# Altium PCB PCB1.PcbDoc
Units mil, origin at the board's own origin, x right, y up, seen from the top; angles counter-clockwise.
Board outline 3250 x 3000 mil, 2 copper layers (Top Layer, Bottom Layer); 12 components, 7 nets, 124 pads, 0 vias.
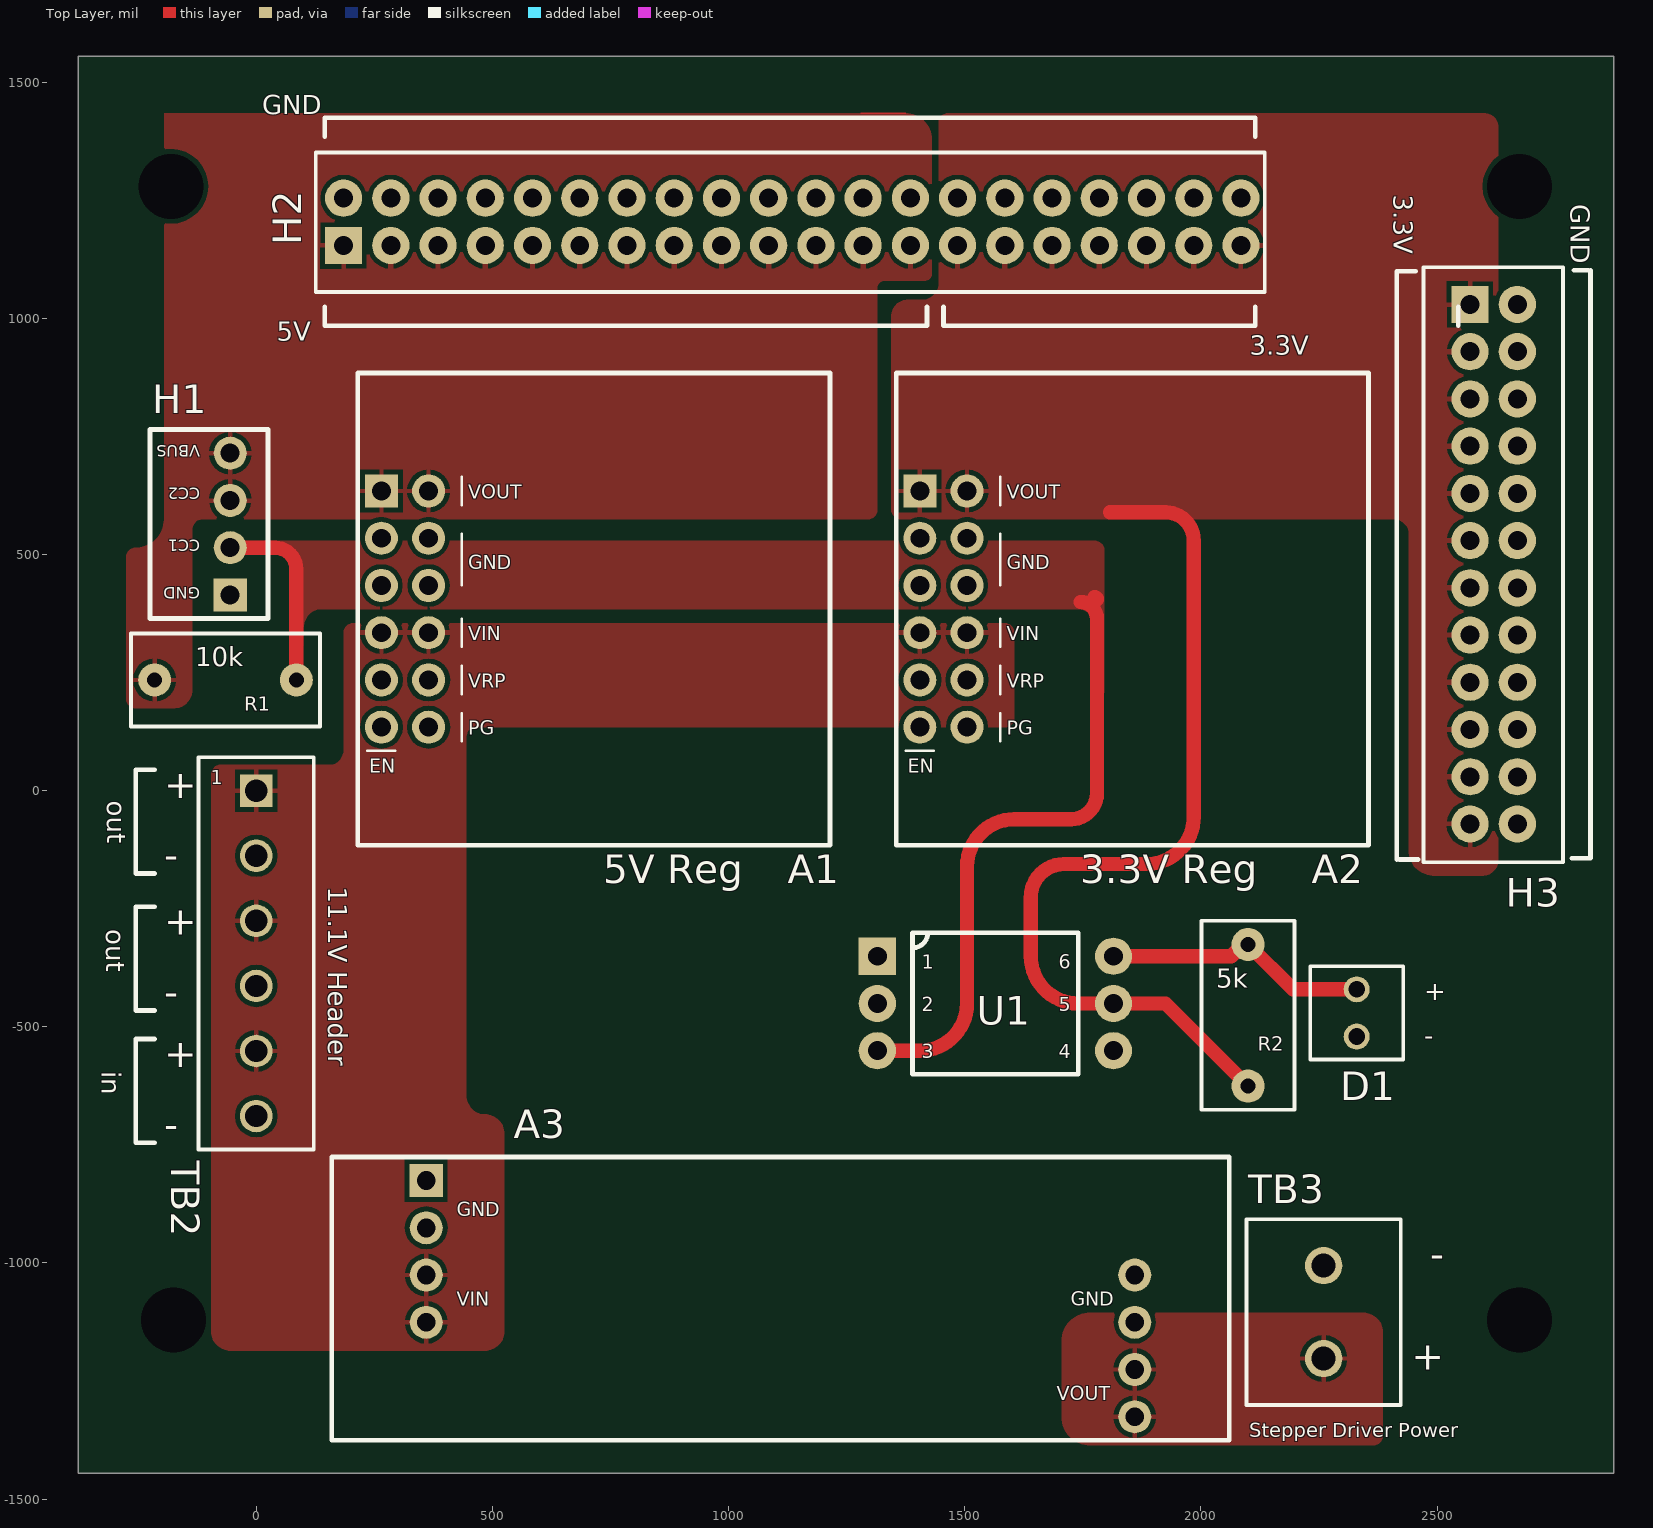
[diagram p0: Top Layer view]
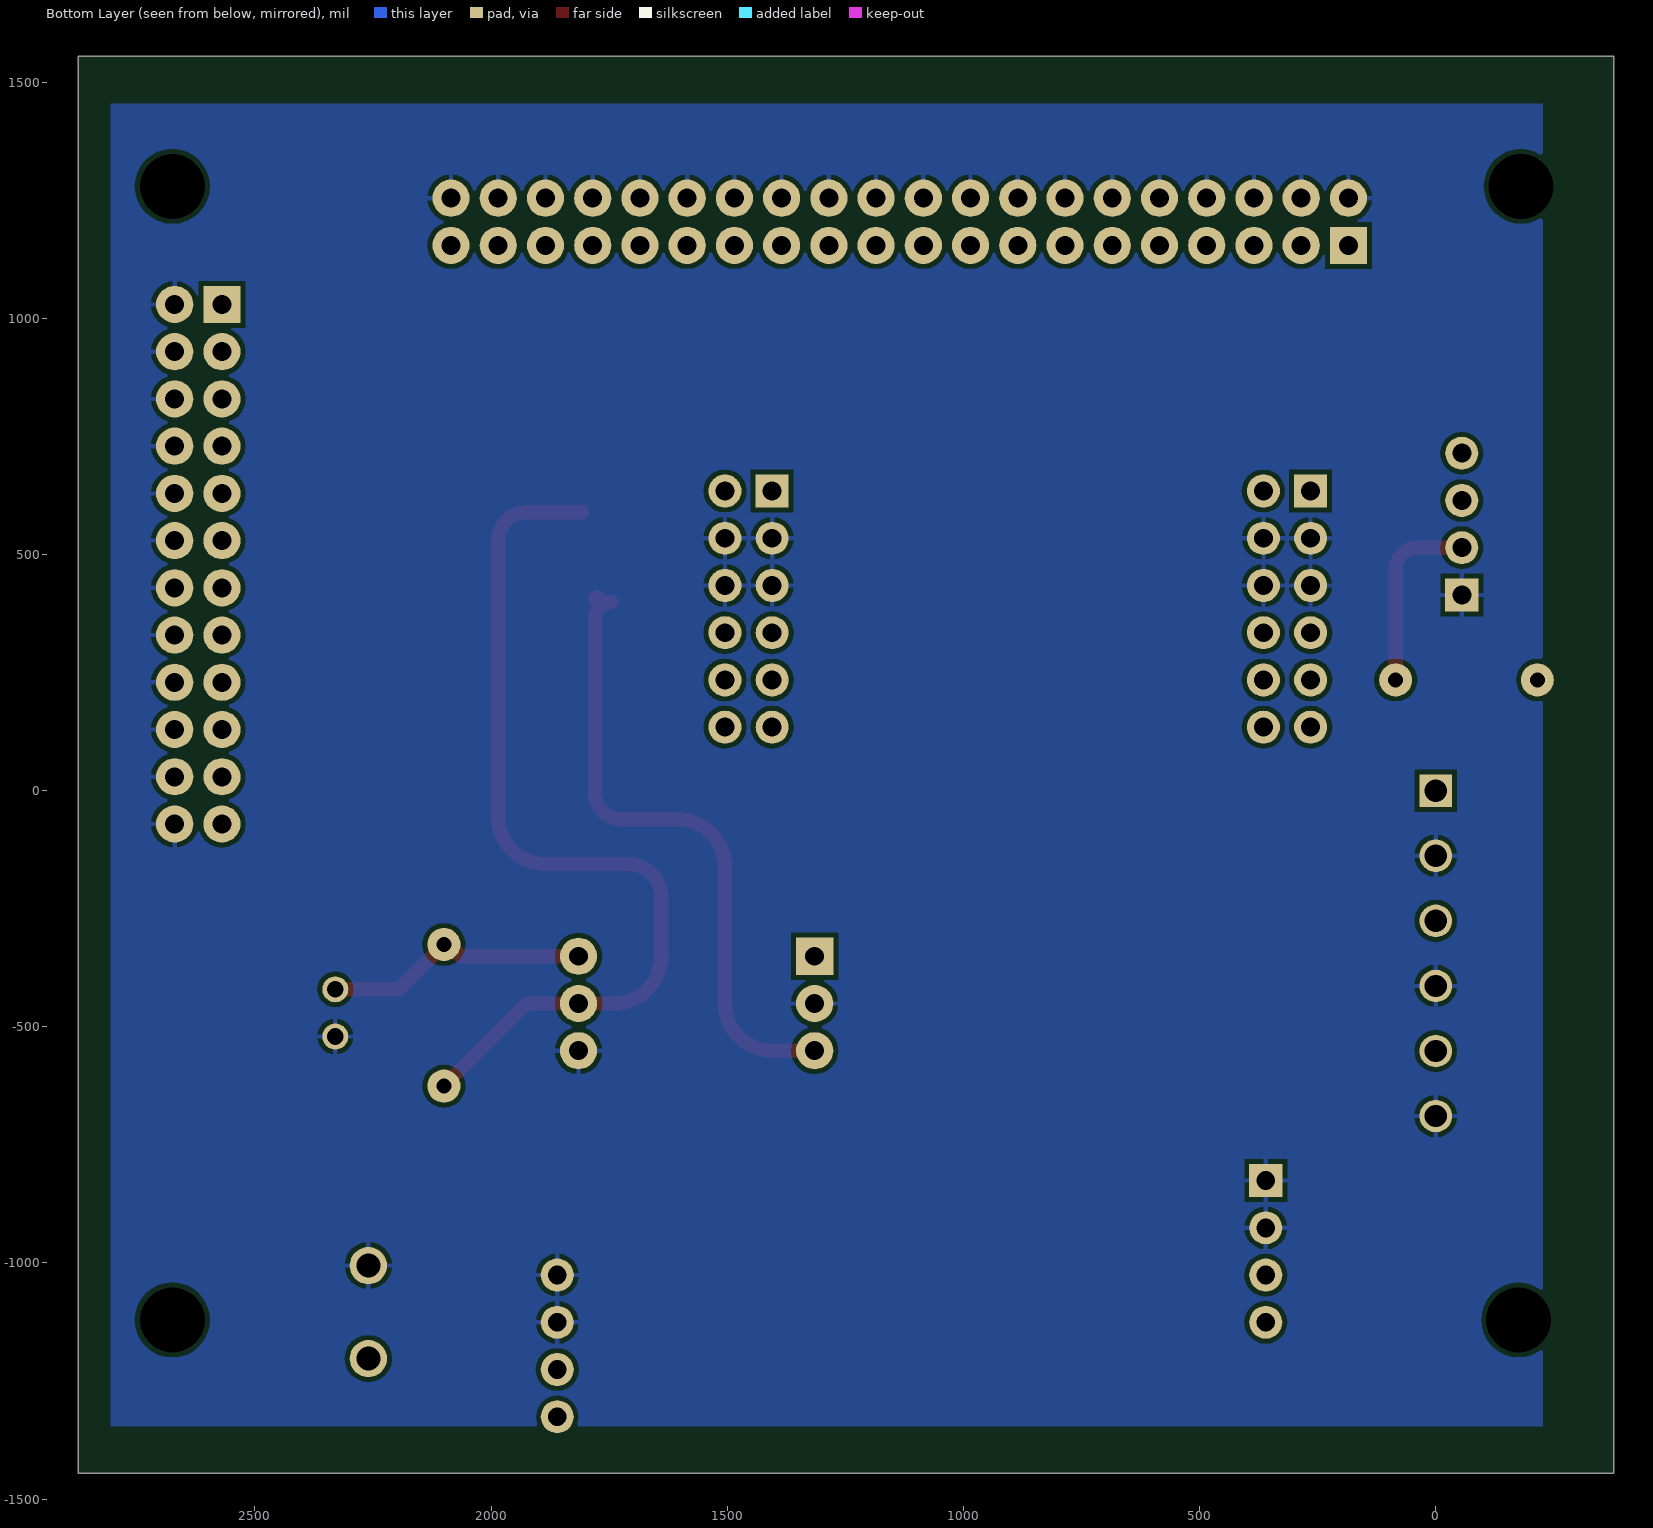
[diagram p1: Bottom Layer view, seen from below]
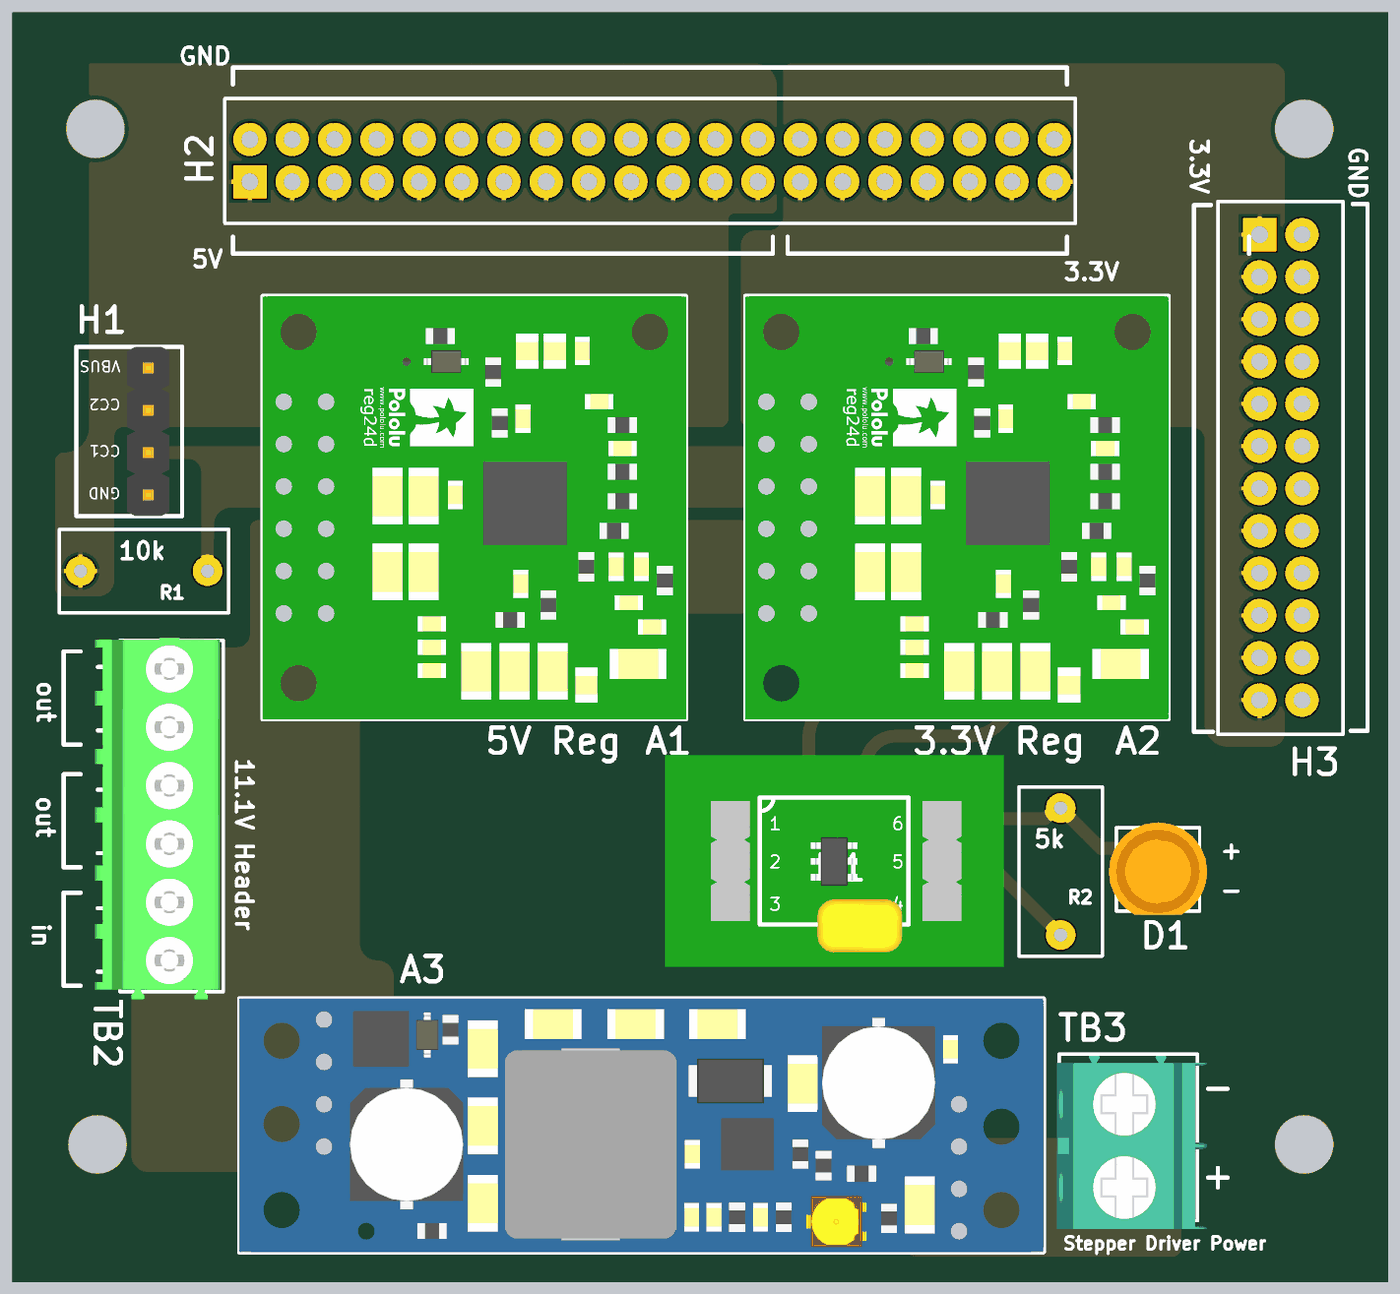
[diagram p2: 3D render of the assembled board from above, using the file's embedded part models]

## Layer stack, top to bottom
Top Solder: solder mask 0.4, Solder Resist, Dk 3.5
Top Layer: signal copper 1.4
Dielectric 1: dielectric 12.6, FR-4, Dk 4.8
Bottom Layer: signal copper 1.4
Bottom Solder: solder mask 0.4, Solder Resist, Dk 3.5

## Board outline
-376.3,1554.41 2873.7,1554.41 2873.7,-1445.59 -376.3,-1445.59

## Design rules (kind name [scope] priority, off if disabled: settings)
Clearance [All] p1: gap=10 ignorepadtopadclearanceinfootprint=FALSE except(0: Arc-Hole Track-Hole SMDPad-Hole THPad-Hole Via-Hole Fill-Hole Poly-Hole Region-Hole Text-Hole)
PolygonConnect [All] p1: connectstyle=Relief reliefconductorwidth=10 reliefentries=4 polygonreliefangle="90 Angle" airgapwidth=10
RoutingVias [All] p1: holewidth=28 width=50 viastyle="Through Hole" minholewidth=28 minwidth=50 maxholewidth=28 maxwidth=50
SolderMaskExpansion [All] p1: expansion=4 istentingtop=FALSE
Width [All] p1: maxlimit=500 minlimit=10 preferedwidth=10
30 further rules are at their usual default settings.

## Components (designator, comment, footprint, x,y, rotation, side; value= is the part's Value field where it differs from the comment)
A1 "Step Down Voltage Regulator" "New Volt Reg TEMPLATE" 265,634.41 r0 top
A2 "Step Down Voltage Regulator" "New Volt Reg TEMPLATE" 1405,634.41 r0 top
A3 "Step Up Regulator" "24V STEP UP REGULATOR" 360,-825.59 r0 top
D1 "LED" LED 2330,-520.59 r90 top
H1 "USB Type-C Receptacle" "USB Type-C Receptacle" -55,414.41 r180 top
H2 "2x20 Position Header" "2x20 Header" 185,1154.41 r90 top
H3 "2x12 Header" "2x12 HEADER" 2570,1029.41 r0 top
R1 "10k" Resistor 85,234.41 r180 top
R2 "5k" Resistor 2100,-625.59 r90 top
TB2 "6 Position Terminal Block" "NEW 6 Terminal" 0,0 r0 top
TB3 "2 Position Terminal Block" "Terminal Block" 2260,-1202.44 r90 top
U1 "TPS3702 Breakout" "TPS3702 Breakout" 1315,-350.59 r0 top

## Footprints (in the part's own frame and the unit in brackets; to place one, negate y for a bottom-side part, rotate by r counter-clockwise, add the part's x,y. Pads: shape width x height; smd on the part's side, far side on the other; paste and mask are expansions set on the pad)
"2x12 HEADER" [mm]
  rect 2x2 hole 1.02: 1(0,0)
  round 2 hole 1.02: 2(0,-2.54) 3(0,-5.08) 4(0,-7.62) 5(0,-10.16) 6(0,-12.7) 7(0,-15.24) 8(0,-17.78) 9(0,-20.32) 10(0,-22.86) 11(0,-25.4) 12(0,-27.94) 13(2.54,-27.94) 14(2.54,-25.4) 15(2.54,-22.86) 16(2.54,-20.32) 17(2.54,-17.78) 18(2.54,-15.24) 19(2.54,-12.7) 20(2.54,-10.16) 21(2.54,-7.62) 22(2.54,-5.08) 23(2.54,-2.54) 24(2.54,0)
  silkscreen extent -2.5,-30 5,2
"2x20 Header" [mm]
  rect 2x2 hole 1.02: 1(0,0)
  round 2 hole 1.02: 2(0,-2.54) 3(0,-5.08) 4(0,-7.62) 5(0,-10.16) 6(0,-12.7) 7(0,-15.24) 8(0,-17.78) 9(0,-20.32) 10(0,-22.86) 11(0,-25.4) 12(0,-27.94) 13(0,-30.48) 14(0,-33.02) 15(0,-35.56) 16(0,-38.1) 17(0,-40.64) 18(0,-43.18) 19(0,-45.72) 20(0,-48.26) 21(2.54,-48.26) 22(2.54,-45.72) 23(2.54,-43.18) 24(2.54,-40.64) 25(2.54,-38.1) 26(2.54,-35.56) 27(2.54,-33.02) 28(2.54,-30.48) 29(2.54,-27.94) 30(2.54,-25.4) 31(2.54,-22.86) 32(2.54,-20.32) 33(2.54,-17.78) 34(2.54,-15.24) 35(2.54,-12.7) 36(2.54,-10.16) 37(2.54,-7.62) 38(2.54,-5.08) 39(2.54,-2.54) 40(2.54,0)
  silkscreen extent -2.5,-49.53 5,1.5
"24V STEP UP REGULATOR" [mil]
  round 70 hole 40: 1(0,-300) 1(0,-200) 2(0,-100) 3(1500,-300) 3(1500,-200) 4(1500,-500) 4(1500,-400)
  rect 70x70 hole 40: 2(0,0)
  silkscreen extent -200,-550 1700,50, body extent -200,-550 1700,50, height 408
LED [mil]
  round 55 hole 35.43: 1(0,0) 2(100,0)
  silkscreen extent -49,-98 149,98, body extent -57,-116 161,116, height 359
"NEW 6 Terminal" [mm]
  rect 1.75x1.75 hole 1.2: 1(0,0)
  round 1.75 hole 1.2: 2(0,-3.5) 3(0,-7) 4(0,-10.5) 5(0,-14) 6(0,-17.5)
  silkscreen extent -3.1,-19.3 3.1,1.8, body extent -4.63,-19.74 2.92,1.96, height 9.15
"New Volt Reg TEMPLATE" [mil]
  rect 70x70 hole 40: 1(0,0)
  round 70 hole 40: 1(100,0) 2(0,-200) 2(0,-100) 2(100,-200) 2(100,-100) 3(0,-300) 3(100,-300) 4(0,-400) 4(100,-400) 5(0,-500) 6(100,-500)
  silkscreen extent -50,-750 950,250, body extent -50,-750 950,250, height 133
Resistor [mil]
  round 70 hole 31.5: 1(0,0) 2(300,0)
  silkscreen extent -50,-98 350,98
"Terminal Block" [mm]
  round 2 hole 1.3: 1(0,0) 2(5,0)
  silkscreen extent -2.5,-4.15 7.5,4.15, body extent -3.01,-4.71 7.39,4.29, height 11.41
"TPS3702 Breakout" [mm]
  rect 2x2 hole 1.02: 1(0,0)
  round 2 hole 1.02: 2(0,-2.54) 3(0,-5.08) 4(12.7,-5.08) 5(12.7,-2.54) 6(12.7,0)
  silkscreen extent 1.89,-6.35 10.81,1.27, body extent -3.81,-8.89 16.51,3.81, height 5.35
"USB Type-C Receptacle" [mil]
  rect 70x70 hole 40.16: 1(0,0)
  round 70 hole 40.16: 2(0,-100) 3(0,-200) 4(0,-300)
  silkscreen extent -80,-350 170,50, body extent -50,-350 50,50, height 317

## Part data
R1 R2: library part Resistor

## Free pads (board coordinates)
  round 3 hole 137.8: 2(-180,1279.41) 2(-175,-1120.59) 2(2675,-1120.59) 2(2675,1279.41)

## Nets (pads, with @x,y where several pads share a name; then routed paths per layer and width w, separated by ;. In a path a pad name is that pad's centre, name@x,y a point inside that pad or via, vN(x,y) a via of type N, cw(c..) or ccw(c..) an arc to the next point about the centre after c; other vN are vias at no path point)
3.3V: A2.1 H2.14 H2.15 H2.16 H2.17 H2.18 H2.19 H2.20 H3.1 H3.2 H3.3 H3.4 H3.5 H3.6 H3.7 H3.8 H3.9 H3.10 H3.11 H3.12 R2.1 U1.5 | length 1953.4
  Top Layer w30: 1807.5,589.41 1925,589.41 cw(c1925,529.41) 1985,529.41 1985,-55.59 cw(c1885,-55.59) 1885,-155.59 1710,-155.59 ccw(c1710,-225.59) 1640,-225.59 1640,-350.59 ccw(c1740,-350.59) 1740,-450.59 U1.5 1925,-450.59 R2.1
5V: A1.1 H1.3 H1.4 H2.1 H2.2 H2.3 H2.4 H2.5 H2.6 H2.7 H2.8 H2.9 H2.10 H2.11 H2.12 H2.13 R1.2
24V: A3.4 TB3.1
BatteryIn: A1.3 A2.3 A3.1 TB2.1 TB2.3 TB2.5
GND: A1.2 A2.2 A3.2 A3.3 D1.1 H1.1 H2.21 H2.22 H2.23 H2.24 H2.25 H2.26 H2.27 H2.28 H2.29 H2.30 H2.31 H2.32 H2.33 H2.34 H2.35 H2.36 H2.37 H2.38 H2.39 H2.40 H3.13 H3.14 H3.15 H3.16 H3.17 H3.18 H3.19 H3.20 H3.21 H3.22 H3.23 H3.24 TB2.2 TB2.4 TB2.6 TB3.2 U1.2 U1.4
NetD1_2: D1.2 R2.2 U1.6 | length 564.7
  Top Layer w30: U1.6 2064.18,-350.59 2089.18,-325.59 R2.2 2195,-420.59 D1.2
NetH1_2: H1.2 R1.1 U1.3 | length 1734
  Top Layer w30: H1.2 39.66,514.41 cw(c39.66,469.31) 84.76,469.31 84.76,234.41 R1.1 ; U1.3 1405,-550.59 ccw(c1405,-450.59) 1505,-450.59 1505,-160.59 cw(c1605,-160.59) 1605,-60.59 1725,-60.59 ccw(c1725,-5.59) 1780,-5.59 1780,364.41 ccw(c1745,364.41) 1745,399.41 ; 1775,409.41 cw(c1775,404.41) 1780,404.41
pads on no net: A1.4 A1.5 A1.6 A2.4 A2.5 A2.6 U1.1

## Polygon pours and split planes (outlines as drawn)
3.3V on Top Layer "3.3V_L01_P031" (solid, pour order 31): 1713,624.41 ccw(c1748,624.41) 1748,589.41 1866.99,589.41 cw(c1866.99,581.91) 1866.99,574.41 1612,574.41 cw(c1612,582.41) 1604,582.41 1604,761.41 cw(c1623,761.41) 1623,780.41 1703,780.41 cw(c1703,770.41) 1713,770.41
3.3V on Top Layer "3.3V_L01_P014" (solid, pour order 14): 2264.92,1004.41 2264.92,615.03 cw(c2224.92,615.03) 2224.92,575.03 1364.92,575.03 cw(c1364.92,595.03) 1344.92,595.03 1344.92,1004.41
3.3V on Top Layer "3.3V_L01_P044" (solid, pour order 44): 1345,1004.41 cw(c1379.92,1004.41) 1379.92,1039.41 1410,1039.41 ccw(c1410,1074.41) 1445,1074.41 1445,1414.41 cw(c1465,1414.41) 1465,1434.41 2149.58,1434.41 cw(c2149.58,1398.99) 2185,1398.99 2185,964.41 cw(c2180,964.41) 2180,959.41 1345,959.41
5V on Top Layer "5V_L01_P043" (solid, pour order 43): 1260,1434.41 1375,1434.41 cw(c1375,1379.41) 1430,1379.41 1430,1094.41 cw(c1415,1094.41) 1415,1079.41 1330,1079.41 ccw(c1330,1064.41) 1315,1064.41 1315,994.41 1260,994.41
no net on Top Layer "NONET_L01_P041" (solid, pour order 41): 1280,1434.41 1365,1434.41 1375,1434.41
NetH1_2 on Top Layer "NETH1_2_L01_P033" (solid, pour order 33): 140,384.41 ccw(c140,344.41) 100,344.41 100,309.41 cw(c95,309.41) 95,304.41 cw(c95,314.41) 85,314.41 85,429.41 185,429.41 cw(c185,419.41) 195,419.41 195,404.41 cw(c175,404.41) 175,384.41
NetH1_2 on Top Layer "NETH1_2_L01_P016" (solid, pour order 16): 790,529.41 cw(c790,514.41) 805,514.41 805,404.41 cw(c785,404.41) 785,384.41 95,384.41 cw(c95,394.41) 85,394.41 85,464.41 ccw(c35,464.41) 35,514.41 15,514.41 cw(c15,519.41) 10,519.41 cw(c20,519.41) 20,529.41
NetH1_2 on Top Layer "NETH1_2_L01_P032" (solid, pour order 32): 1740,384.41 cw(c1740,349.41) 1775,349.41 1775,209.41 ccw(c1785,209.41) 1785,199.41 ccw(c1785,209.41) 1795,209.41 1795,424.41 ccw(c1770,424.41) 1770,449.41 1685,449.41 ccw(c1685,444.41) 1680,444.41 1680,399.41 ccw(c1695,399.41) 1695,384.41
NetH1_2 on Top Layer "NETH1_2_L01_P024" (solid, pour order 24): 1775,529.41 cw(c1775,509.41) 1795,509.41 1795,404.41 cw(c1775,404.41) 1775,384.41 770,384.41 cw(c770,404.41) 750,404.41 750,514.41 cw(c765,514.41) 765,529.41
3.3V on Top Layer "3.3V_L01_P039" (solid, pour order 39): 2410,574.41 cw(c2410,544.41) 2440,544.41 2440,-125.59 ccw(c2495,-125.59) 2495,-180.59 2595,-180.59 ccw(c2595,-145.59) 2630,-145.59 2630,1404.41 ccw(c2600,1404.41) 2600,1434.41 2155,1434.41 ccw(c2155,1379.41) 2100,1379.41 2100,629.41 ccw(c2155,629.41) 2155,574.41
5V on Top Layer "5V_L01_P036" (solid, pour order 36): 1315,1434.41 1315,594.41 cw(c1295,594.41) 1295,574.41 645,574.41 cw(c645,634.41) 585,634.41 585,1404.41 cw(c615,1404.41) 615,1434.41
5V on Top Layer "5V_L01_P008" (solid, pour order 8): 705,1434.41 cw(c705,1414.41) 725,1414.41 725,614.41 cw(c685,614.41) 685,574.41 -175,574.41 cw(c-175,594.41) -195,594.41 -195,1434.41
BatteryIn on Top Layer "BATTERYIN_L01_P037" (solid, pour order 37): 185,84.41 cw(c155,84.41) 155,54.41 -75,54.41 ccw(c-75,34.41) -95,34.41 -95,-595.59 ccw(c-65,-595.59) -65,-625.59 225,-625.59 ccw(c225,-595.59) 255,-595.59 255,154.41 205,154.41 ccw(c205,134.41) 185,134.41
24V on Top Layer "24V_L01_P035" (solid, pour order 35): 1705,-1325.59 ccw(c1765,-1325.59) 1765,-1385.59 2365,-1385.59 ccw(c2365,-1365.59) 2385,-1365.59 2385,-1145.59 ccw(c2345,-1145.59) 2345,-1105.59 1765,-1105.59 ccw(c1765,-1165.59) 1705,-1165.59
BatteryIn on Top Layer "BATTERYIN_L01_P034" (solid, pour order 34): 525,-1145.59 cw(c485,-1145.59) 485,-1185.59 -55,-1185.59 cw(c-55,-1145.59) -95,-1145.59 -95,-545.59 cw(c-15,-545.59) -15,-465.59 85,-465.59 ccw(c85,-365.59) 185,-365.59 185,334.41 cw(c205,334.41) 205,354.41 1585,354.41 cw(c1585,334.41) 1605,334.41 1605,154.41 cw(c1585,154.41) 1585,134.41 465,134.41 ccw(c465,114.41) 445,114.41 445,-645.59 ccw(c485,-645.59) 485,-685.59 cw(c485,-725.59) 525,-725.59
5V on Top Layer "5V_L01_P013" (solid, pour order 13): -195,654.41 -195,574.41 cw(c-255,574.41) -255,514.41 ccw(c-255,494.41) -275,494.41 -275,194.41 ccw(c-255,194.41) -255,174.41 -175,174.41 ccw(c-175,214.41) -135,214.41 -135,554.41 cw(c-115,554.41) -115,574.41 -115,654.41
GND on Bottom Layer "GND_L02_P000" (solid, pour order 0): -226.3,1454.41 -226.3,-1345.59 2805,-1345.59 2805,1454.41

## Silkscreen, mask and mechanical layers (free items; w line width, h text height)
Top Overlay:
  lines w10: -215,-745.59 -255,-745.59 -255,-525.59 -215,-525.59 ; -215,-465.59 -255,-465.59 -255,-245.59 -215,-245.59 ; -215,-175.59 -255,-175.59 -255,44.41 -215,44.41 ; 145,1024.41 145,984.41 1420,984.41 1420,1024.41 ; 145,1384.41 145,1424.41 2115,1424.41 2115,1384.41 ; 1455,1024.41 1455,984.41 2115,984.41 2115,1024.41 ; 2415,-145.59 2415,1099.41 2445,1099.41 2455,1099.41 ; 2420,-145.59 2450,-145.59 2460,-145.59 ; 2545,984.41 2545,1024.41 ; 2785,-143.09 2795,-143.09 2825,-143.09 2825,1101.91 ; 2790,1101.91 2820,1101.91
  text "GND" at 13,1432.41 h40
  text "3.3V" at 2408,1261.41 h40 r270
  text "GND" at 2783,1241.41 h40 r270
  text "5V" at 43,952.41 h40
  text "3.3V" at 2103,922.41 h40
  text "10k" at -129.17,263.55 h40
  text "+" at -195,-15.59 h60
  text "out" at -315.86,-21.43 h40 r270
  text "-" at -195,-165.58 h60
  text "5V Reg" at 735,-195.6 h60
  text "3.3V Reg" at 1745,-195.6 h60
  text "11.1V Header" at 153,-203.59 h40 r270
  text "out" at -317,-293.59 h40 r270
  text "+" at -195,-305.59 h60
  text "5k" at 2033,-417.59 h40
  text "+" at 2473,-444.26 h40
  text "-" at -195,-455.58 h60
  text "-" at 2473,-537.58 h40
  text "+" at -195,-585.59 h60
  text "in" at -327,-593.59 h40 r270
  text "-" at -195,-735.58 h60
  text "-" at 2515,-965.6 h60 r180
  text "+" at 2515,-1175.59 h60 r180
  text "Stepper Driver Power" at 2102,-1368.59 h30
Board Outline:
  lines w3.94: -375,-1445.59 -375,1554.41 2875,1554.41 2875,-1445.59 -375,-1445.59
Mounting Hole Spacing (Mech5):
  lines w25: -175,-1935.59 -175,-1465.59 ; 50,-1475.59 -175,-1700.59 ; 60,-1935.59 -175,-1700.59 ; 2440,-1465.59 2675,-1700.59 ; 2450,-1925.59 2675,-1700.59 ; 2675,-1935.59 2675,-1465.59 ; 2900,-1120.59 3370,-1120.59 ; 2900,1044.41 3135,1279.41 ; 2900,1279.41 3370,1279.41 ; 2910,-895.59 3135,-1120.59 ; 3360,1054.41 3135,1279.41 ; 3370,-885.59 3135,-1120.59 ; -175,-1700.59 2675,-1700.59 ; 3135,-1120.59 3135,1279.41
  text "2.4 inches / 60.96 mm" at 3510,-475.59 h100 r90
  text "2.85 inches / 72.39 mm" at 720,-2055.59 h100

## Text inside footprints (layer, text, board x,y; h text height)
A1: Top Overlay "PG" at 448.94,118.35 h29.53; Top Overlay "EN" at 238.94,38.35 h29.53; Top Overlay "VRP" at 448.94,218.35 h29.53; Top Overlay "VIN" at 448.94,318.35 h29.53; Top Overlay "GND" at 448.94,468.35 h29.53; Top Overlay "VOUT" at 448.94,618.35 h29.53; Mechanical 1 "PG" at 448.94,118.35 h29.53; Mechanical 1 "EN" at 238.94,38.35 h29.53; Mechanical 1 "VRP" at 448.94,218.35 h29.53; Mechanical 1 "VIN" at 448.94,318.35 h29.53; Mechanical 1 "GND" at 448.94,468.35 h29.53; Mechanical 1 "VOUT" at 448.94,618.35 h29.53
A2: Top Overlay "VOUT" at 1588.94,618.35 h29.53; Top Overlay "GND" at 1588.94,468.35 h29.53; Top Overlay "VIN" at 1588.94,318.35 h29.53; Top Overlay "VRP" at 1588.94,218.35 h29.53; Top Overlay "EN" at 1378.94,38.35 h29.53; Top Overlay "PG" at 1588.94,118.35 h29.53; Mechanical 1 "VOUT" at 1588.94,618.35 h29.53; Mechanical 1 "GND" at 1588.94,468.35 h29.53; Mechanical 1 "VIN" at 1588.94,318.35 h29.53; Mechanical 1 "VRP" at 1588.94,218.35 h29.53; Mechanical 1 "EN" at 1378.94,38.35 h29.53; Mechanical 1 "PG" at 1588.94,118.35 h29.53
A3: Top Overlay "VOUT" at 1695,-1290.59 h29.53; Top Overlay "GND" at 1725,-1090.59 h29.53; Top Overlay "VIN" at 425,-1090.59 h29.53; Top Overlay "GND" at 425,-900.59 h29.53
H1: Top Overlay "GND" at -118.5,430.91 h25 r180; Top Overlay "CC1" at -118.5,530.91 h25 r180; Top Overlay "CC2" at -118.5,640.91 h25 r180; Top Overlay "VBUS" at -118.5,730.91 h25 r180
TB2: Top Overlay "1" at -96.06,13.94 h29.53; Mechanical 1 "1" at -96.06,13.94 h29.53
U1: Top Overlay "4" at 1698.94,-566.65 h29.53; Top Overlay "5" at 1698.94,-466.65 h29.53; Top Overlay "6" at 1698.94,-376.65 h29.53; Top Overlay "3" at 1408.94,-566.65 h29.53; Top Overlay "2" at 1408.94,-466.65 h29.53; Top Overlay "1" at 1408.94,-376.65 h29.53